# Altium PCB LEDs.PcbDoc
Units mm, origin at the board's own origin, x right, y up, seen from the top; angles counter-clockwise.
Board outline 40 x 41.27 mm, 2 copper layers (Top Layer, Bottom Layer); 53 components, 120 nets, 164 pads, 38 vias.
Unrouted connection lines stored in the file: 3.
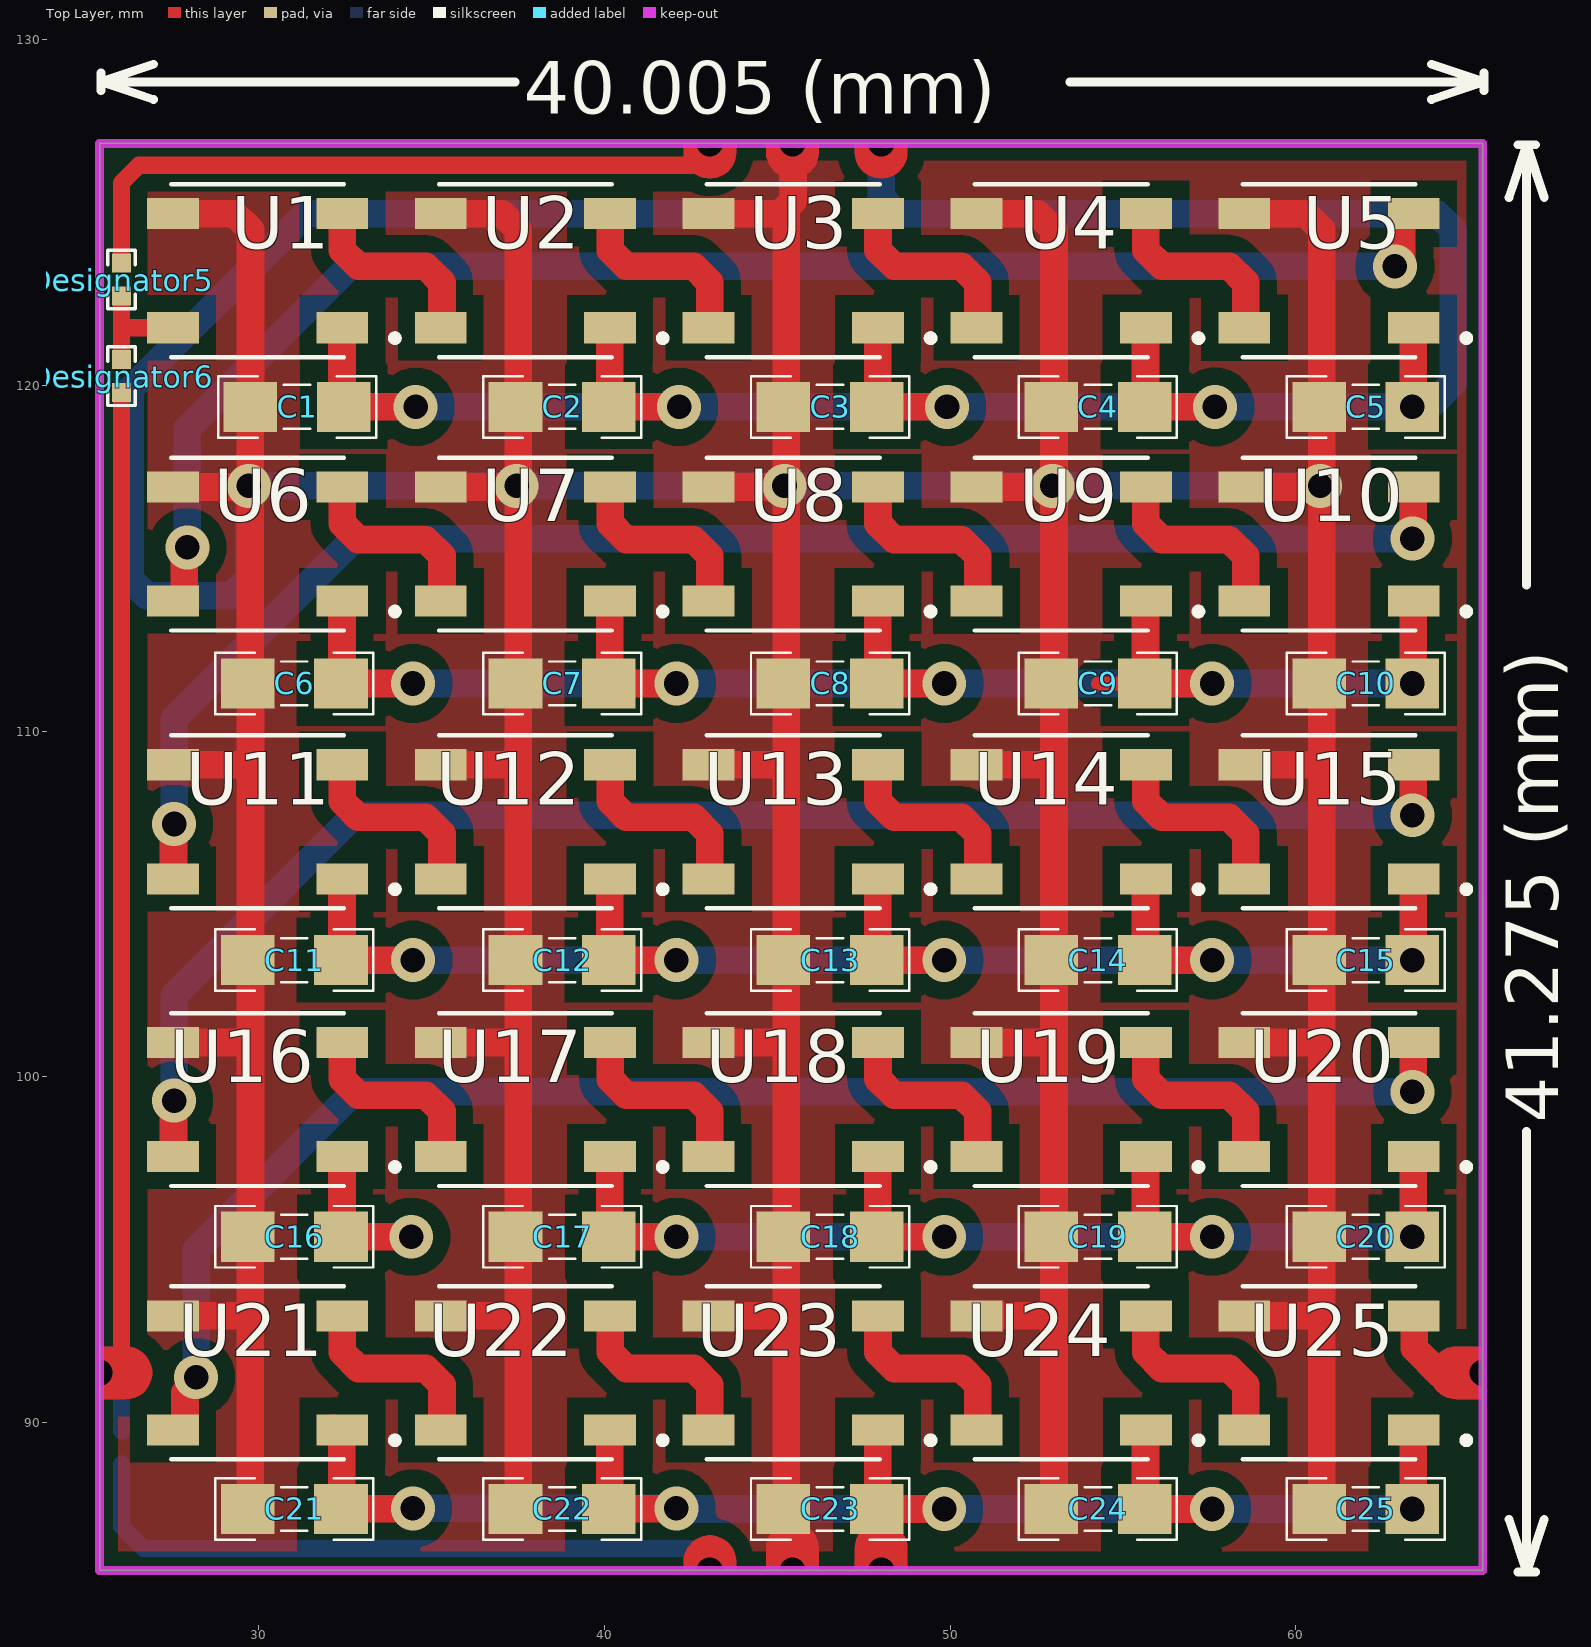
[diagram p0: Top Layer view]
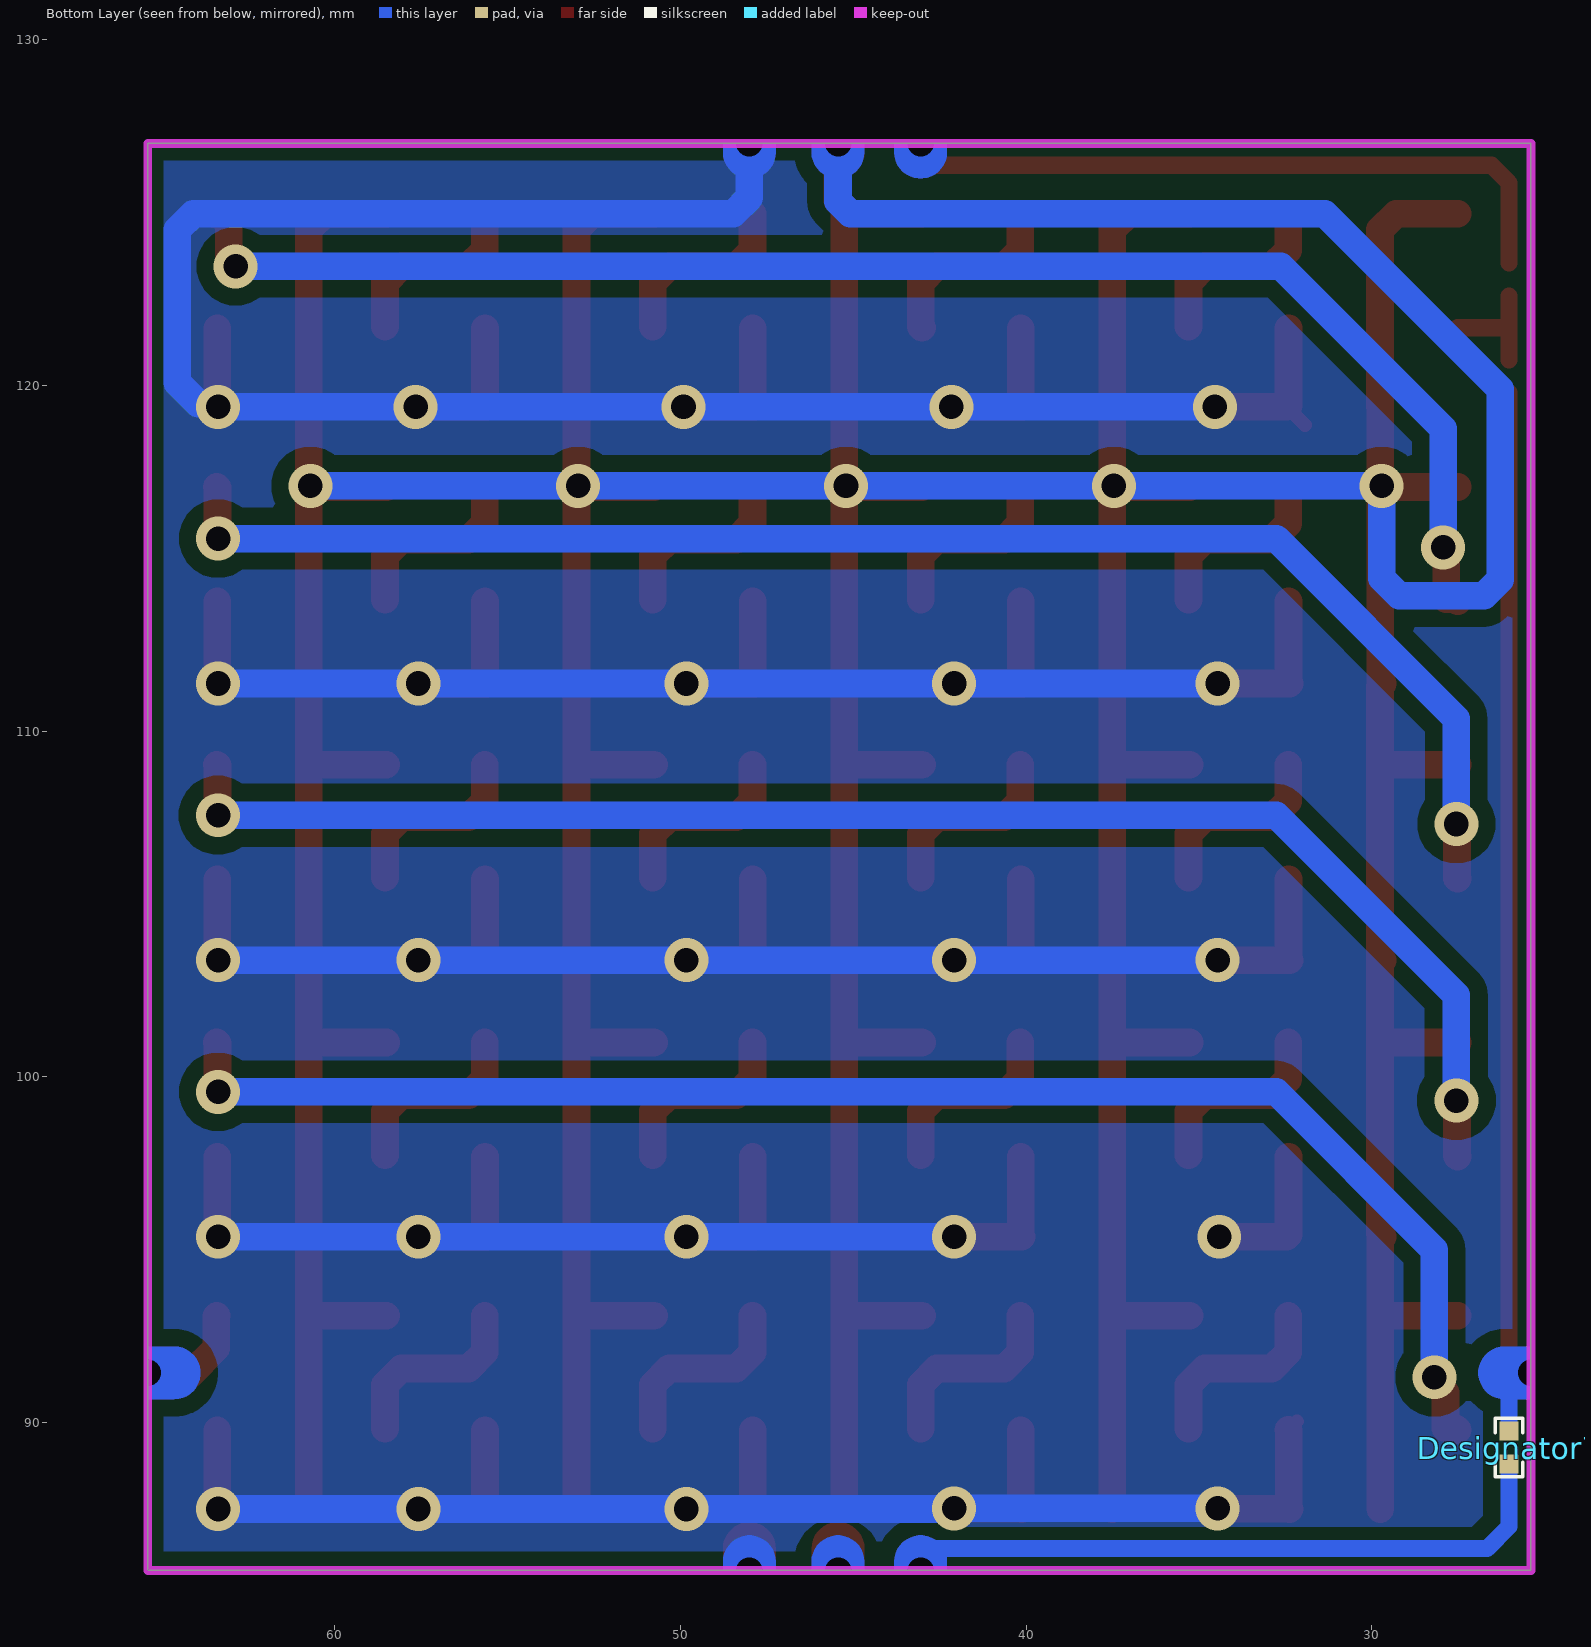
[diagram p1: Bottom Layer view, seen from below]
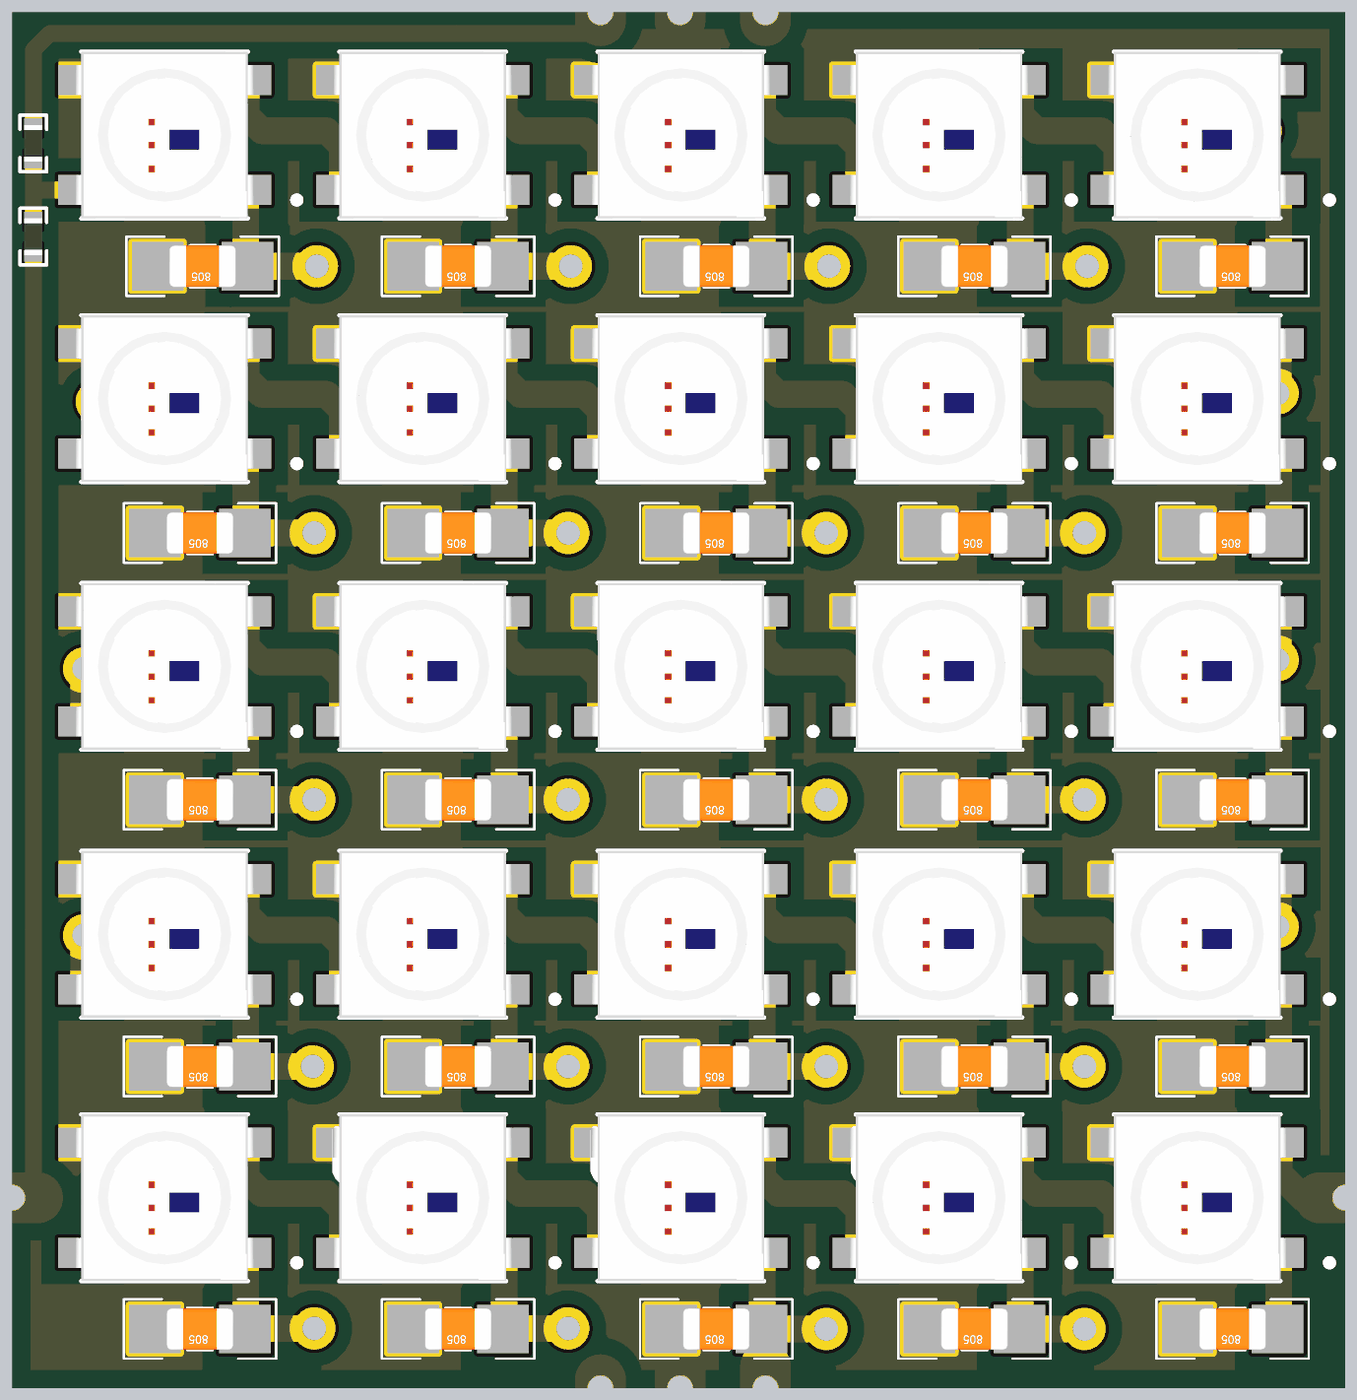
[diagram p2: 3D render of the assembled board from above, using the file's embedded part models]

## Layer stack, top to bottom
Top Solder: solder mask 0.0102, Solder Resist, Dk 3.5
Top Layer: signal copper 0.0356
Dielectric 1: dielectric 0.32, FR-4, Dk 4.8
Bottom Layer: signal copper 0.0356
Bottom Solder: solder mask 0.0102, Solder Resist, Dk 3.5

## Board outline
25.4,85.725 65.405,85.725 65.405,127 25.4,127

## Design rules (kind name [scope] priority, off if disabled: settings)
Clearance [All] p1: gap=0.254 ignorepadtopadclearanceinfootprint=FALSE
PolygonConnect [All] p1: connectstyle=Direct reliefconductorwidth=0.254 reliefentries=4 polygonreliefangle="90 Angle" airgapwidth=0.254
RoutingVias [All] p1: holewidth=0.711 width=1.27 viastyle="Through Hole" minholewidth=0.711 minwidth=1.27 maxholewidth=0.711 maxwidth=1.27
SolderMaskExpansion [All] p1: expansion=0.102 istentingtop=FALSE
Width [All] p1: maxlimit=2 minlimit=0.254 preferedwidth=0.8
30 further rules are at their usual default settings.

## Classes and differential pairs
component class LEDs: C1 C2 C3 C4 C5 C6 C7 C8 C9 C10 C11 C12 C13 C14 C15 C16 C17 C18 C19 C20 C21 C22 C23 C24 C25 F F2 U2 U3 U4 U6 U7 U8 U9 U10 U11 U12 U13 U14 U15 U16 U17 U18 U19 U20 U21 U22 U23 U24 U25

## Components (designator, comment, footprint, x,y, rotation, side; value= is the part's Value field where it differs from the comment)
C1 "0.1uF" CAPC3413X12N 31.115,119.38 r180 top
C2 "0.1uF" CAPC3413X12N 38.782,119.38 r180 top
C3 "0.1uF" CAPC3413X12N 46.529,119.38 r180 top
C4 "0.1uF" CAPC3413X12N 54.276,119.38 r180 top
C5 "0.1uF" CAPC3413X12N 62.023,119.38 r180 top
C6 "0.1uF" CAPC3413X12N 31.035,111.379 r180 top
C7 "0.1uF" CAPC3413X12N 38.782,111.379 r180 top
C8 "0.1uF" CAPC3413X12N 46.529,111.379 r180 top
C9 "0.1uF" CAPC3413X12N 54.276,111.379 r180 top
C10 "0.1uF" CAPC3413X12N 62.023,111.379 r180 top
C11 "0.1uF" CAPC3413X12N 31.035,103.378 r180 top
C12 "0.1uF" CAPC3413X12N 38.782,103.378 r180 top
C13 "0.1uF" CAPC3413X12N 46.529,103.378 r180 top
C14 "0.1uF" CAPC3413X12N 54.276,103.378 r180 top
C15 "0.1uF" CAPC3413X12N 62.023,103.378 r180 top
C16 "0.1uF" CAPC3413X12N 31.035,95.377 r180 top
C17 "0.1uF" CAPC3413X12N 38.782,95.377 r180 top
C18 "0.1uF" CAPC3413X12N 46.529,95.377 r180 top
C19 "0.1uF" CAPC3413X12N 54.276,95.377 r180 top
C20 "0.1uF" CAPC3413X12N 62.023,95.377 r180 top
C21 "0.1uF" CAPC3413X12N 31.035,87.503 r180 top
C22 "0.1uF" CAPC3413X12N 38.782,87.503 r180 top
C23 "0.1uF" CAPC3413X12N 46.529,87.503 r180 top
C24 "0.1uF" CAPC3413X12N 54.276,87.503 r180 top
C25 "0.1uF" CAPC3413X12N 62.023,87.503 r180 top
Designator5 "Comment" RES0402 26.035,123.063 r90 top
Designator6 "Comment" RES0402 26.035,120.269 r90 top
Designator7 "Comment" RES0402 26.035,89.281 r90 bottom
U1 "WS2812B-B" LED_WS2812B-B 29.972,123.317 r180 top
U2 "WS2812B-B" LED_WS2812B-B 37.719,123.317 r180 top
U3 "WS2812B-B" LED_WS2812B-B 45.466,123.317 r180 top
U4 "WS2812B-B" LED_WS2812B-B 53.213,123.317 r180 top
U5 "WS2812B-B" LED_WS2812B-B 60.96,123.317 r180 top
U6 "WS2812B-B" LED_WS2812B-B 29.972,115.411 r180 top
U7 "WS2812B-B" LED_WS2812B-B 37.719,115.411 r180 top
U8 "WS2812B-B" LED_WS2812B-B 45.466,115.411 r180 top
U9 "WS2812B-B" LED_WS2812B-B 53.213,115.411 r180 top
U10 "WS2812B-B" LED_WS2812B-B 60.96,115.411 r180 top
U11 "WS2812B-B" LED_WS2812B-B 29.972,107.379 r180 top
U12 "WS2812B-B" LED_WS2812B-B 37.719,107.379 r180 top
U13 "WS2812B-B" LED_WS2812B-B 45.466,107.379 r180 top
U14 "WS2812B-B" LED_WS2812B-B 53.213,107.379 r180 top
U15 "WS2812B-B" LED_WS2812B-B 60.96,107.379 r180 top
U16 "WS2812B-B" LED_WS2812B-B 29.972,99.346 r180 top
U17 "WS2812B-B" LED_WS2812B-B 37.719,99.346 r180 top
U18 "WS2812B-B" LED_WS2812B-B 45.466,99.346 r180 top
U19 "WS2812B-B" LED_WS2812B-B 53.213,99.346 r180 top
U20 "WS2812B-B" LED_WS2812B-B 60.96,99.346 r180 top
U21 "WS2812B-B" LED_WS2812B-B 29.972,91.44 r180 top
U22 "WS2812B-B" LED_WS2812B-B 37.719,91.44 r180 top
U23 "WS2812B-B" LED_WS2812B-B 45.466,91.44 r180 top
U24 "WS2812B-B" LED_WS2812B-B 53.213,91.44 r180 top
U25 "WS2812B-B" LED_WS2812B-B 60.96,91.44 r180 top

## Footprints (in the part's own frame and the unit in brackets; to place one, negate y for a bottom-side part, rotate by r counter-clockwise, add the part's x,y. Pads: shape width x height; smd on the part's side, far side on the other; paste and mask are expansions set on the pad)
CAPC3413X12N [mm] "Chip Capacitor, 2-Leads, Body 3/40x1/30mm, IPC Medium Density-Design:Abbas Basereh"
  rect 1.55x1.45 smd: 1(-1.35,0) 2(1.35,0)
  silkscreen extent -2.29,-0.89 2.29,0.89, body extent -1,-0.62 1,0.63, height 0.78
LED_WS2812B-B [mm]
  rect 1.5x0.9 smd: 1(-2.45,1.65) 2(-2.45,-1.65) 3(2.45,-1.65) 4(2.45,1.65)
  silkscreen extent -4.07,-2.5 2.5,2.5, body extent -2.7,-2.5 2.7,2.5, height 1.6
RES0402 [mm] "Chip Resistor, 2-Leads, Body 1/00x0/50mm, IPC Medium Density DESIGNER:ABBAS BASEREH"
  rect 0.55x0.55 smd mask+0.06: 1(-0.475,0) 2(0.475,0)
  silkscreen extent -0.85,-0.4 0.85,0.4, body extent -0.55,-0.28 0.55,0.28, height 0.32

## Part data
C1 C2 C3 C4 C5 C6 C7 C8 C9 C10 C11 C12 C13 C14 C15 C16 C17 C18 C19 C20 C21 C22 C23 C24 C25: library part "CAP SMD 0805", "CAP 0805", Data=16-12-2016, Desc.="CAP SMD 0805", Designer="Abbas Basereh"
U1 U2 U3 U4 U5 U6 U7 U8 U9 U10 U11 U12 U13 U14 U15 U16 U17 U18 U19 U20 U21 U22 U23 U24 U25: "Intelligent control LED integrated light source", Package=Package, Availability=Unavailable, Check_prices=https://www.snapeda.com/parts/WS2812B-B/Worldsemi/view-part/5799638/?ref=eda, MF=Worldsemi, MP=WS2812B-B, Price=None, SnapEDA_Link=https://www.snapeda.com/parts/WS2812B-B/Worldsemi/view-part/5799638/?ref=snap

## Free pads (board coordinates)
  round 0 hole 0.762: 4(25.4,91.44) 4(43.053,85.725) 4(43.053,127) 4(45.441,85.725) 4(45.441,127) 4(48.006,85.725) 4(48.006,127) 4(65.405,91.44)

## Via types
v1: diameter 1.27, hole 0.711, Top Layer to Bottom Layer, 38 vias

## Nets (pads, with @x,y where several pads share a name; then routed paths per layer and width w, separated by ;. In a path a pad name is that pad's centre, name@x,y a point inside that pad or via, vN(x,y) a via of type N, cw(c..) or ccw(c..) an arc to the next point about the centre after c; other vN are vias at no path point)
+3.3: 
+5: C1.1 C2.1 C3.1 C4.1 C5.1 C6.1 C7.1 C8.1 C9.1 C10.1 C11.1 C12.1 C13.1 C14.1 C15.1 C16.1 C17.1 C18.1 C19.1 C20.1 C21.1 C22.1 C23.1 C24.1 C25.1 pad.4@48.006,85.725 pad.4@48.006,127 U1.1 U2.1 U3.1 U4.1 U5.1 U6.1 U7.1 U8.1 U9.1 U10.1 U11.1 U12.1 U13.1 U14.1 U15.1 U16.1 U17.1 U18.1 U19.1 U20.1 U21.1 U22.1 U23.1 U24.1 U25.1 | length 258.9
  Top Layer w0.4: C1.1@31.94,118.855 C1.1 ; U21.1@32.172,90.04 U21.1 ; U3.1@47.907,121.658 U3.1 ; 54.282,111.379 C9.1@55.546,111.379
  Top Layer w0.8: C11.1 v1(34.464,103.378) ; C6.1 v1(34.464,111.379) ; U16.1@32.413,97.687 32.413,95.436 32.472,95.377 v1(34.417,95.377) ; C11.1@32.413,103.469 U11.1@32.413,105.719 ; C6.1@32.413,111.502 U6.1@32.413,113.752 ; C1.1@32.413,119.408 U1.1@32.413,121.658 ; U21.1 32.404,89.772 32.404,87.522 C21.1 32.395,87.513 34.455,87.513 v1(34.464,87.522) ; C1.1 v1(34.544,119.38) ; C22.1 40.142,87.513 42.075,87.513 v1(42.084,87.522) ; C17.1 v1(42.084,95.377) ; C12.1 v1(42.084,103.378) ; C7.1 v1(42.084,111.379) ; C2.1 v1(42.164,119.38) ; C22.1@40.16,87.531 U22.1@40.16,89.781 ; C17.1@40.16,95.436 U17.1@40.16,97.687 ; C12.1@40.16,103.469 U12.1@40.16,105.719 ; C7.1@40.16,111.502 U7.1@40.16,113.752 ; C2.1@40.16,119.408 U2.1@40.16,121.658 ; C23.1 v1(49.831,87.503) ; C18.1 v1(49.831,95.377) ; C13.1 v1(49.831,103.378) ; C8.1 v1(49.831,111.379) ; C3.1 v1(49.911,119.38) ; C23.1@47.907,87.531 U23.1@47.907,89.781 ; C18.1@47.907,95.436 U18.1@47.907,97.687 ; C13.1@47.907,103.469 U13.1@47.907,105.719 ; C8.1@47.907,111.502 U8.1@47.907,113.752 ; C3.1@47.907,119.408 U3.1@47.907,121.658 ; C24.1 v1(57.578,87.503) ; C19.1 v1(57.578,95.377) ; C14.1 v1(57.578,103.378) ; C9.1 v1(57.578,111.379) ; C4.1 v1(57.658,119.38) ; C24.1@55.654,87.531 U24.1@55.654,89.781 ; C19.1@55.654,95.436 U19.1@55.654,97.687 ; C14.1@55.654,103.469 U14.1@55.654,105.719 ; C9.1@55.654,111.502 U9.1@55.654,113.752 ; C4.1@55.654,119.408 U4.1@55.654,121.658 ; C25.1@63.401,87.531 U25.1@63.401,89.781 ; C20.1@63.401,95.436 U20.1@63.401,97.687 ; C15.1@63.401,103.469 U15.1@63.401,105.719 ; C10.1@63.401,111.502 U10.1@63.401,113.752 ; C5.1@63.401,119.408 U5.1@63.401,121.658
  Bottom Layer w0.8: v1(34.464,87.522) v1(42.084,87.522) ; v1(34.464,103.378) v1(42.084,103.378) v1(49.831,103.378) v1(57.578,103.378) v1(63.373,103.378) ; v1(34.464,111.379) v1(42.084,111.379) v1(49.831,111.379) v1(57.578,111.379) v1(63.373,111.379) ; v1(34.544,119.38) v1(42.164,119.38) v1(49.911,119.38) ; v1@42.084,87.503 v1(49.831,87.503) v1@57.488,87.503 ; v1(42.084,95.377) v1(49.831,95.377) 57.383,95.377 v1@57.488,95.272 ; 48.006,126.365 48.006,125.437 48.475,124.968 64.085,124.968 64.554,124.499 64.554,120.084 63.94,119.47 63.59,119.47 63.5,119.38 v1(57.658,119.38) v1(49.911,119.38) ; v1@49.871,119.34 v1(49.911,119.38) ; v1(57.578,87.503) v1(63.373,87.503) ; v1(57.578,95.377) v1@63.246,95.377
  other v1: 63.373,95.377 63.373,119.38
EN: 
GND: C1.2 C2.2 C3.2 C4.2 C5.2 C6.2 C7.2 C8.2 C9.2 C10.2 C11.2 C12.2 C13.2 C14.2 C15.2 C16.2 C17.2 C18.2 C19.2 C20.2 C21.2 C22.2 C23.2 C24.2 C25.2 pad.4@45.441,85.725 pad.4@45.441,127 U1.3 U2.3 U3.3 U4.3 U5.3 U6.3 U7.3 U8.3 U9.3 U10.3 U11.3 U12.3 U13.3 U14.3 U15.3 U16.3 U17.3 U18.3 U19.3 U20.3 U21.3 U22.3 U23.3 U24.3 U25.3 | length 299.8
  Top Layer w0.4: U3.3 U3.3@43.053,125.004
  Top Layer w0.8: U21.3 29.295,93.09 ; U16.3 29.295,100.996 ; U11.3 29.295,109.028 ; U6.3 v1@29.295,117.061 ; U1.3 27.523,124.968 29.296,124.968 29.765,124.499 C1.2 ; C16.2 29.765,95.457 29.765,103.298 C11.2 29.765,103.458 29.765,111.299 C6.2 ; C21.2@29.764,87.502 C16.2@29.764,95.377 ; C6.2@29.764,111.379 C1.2@29.764,119.38 ; U22.3 37.042,93.09 ; U17.3 37.042,100.996 ; U12.3 37.042,109.028 ; U7.3 v1@37.042,117.061 ; U2.3 37.042,124.967 37.511,124.498 37.511,111.379 37.511,103.378 C22.2@37.511,87.502 ; U23.3 44.789,93.09 ; U18.3 44.789,100.996 ; U13.3 44.789,109.028 ; U8.3 v1@44.789,117.061 ; U3.3 45.085,124.967 ; C23.2@45.258,87.502 45.258,95.377 45.258,103.378 45.258,111.379 45.258,117.094 45.258,119.38 45.258,125.141 45.466,125.349 45.466,126.365 ; U24.3 52.536,93.09 ; U19.3 52.536,100.996 ; U14.3 52.536,109.028 ; U9.3 v1@52.536,117.061 ; U4.3 52.536,124.967 53.005,124.498 53.005,111.379 53.005,103.378 53.005,95.377 C24.2@53.005,87.502 ; U25.3 60.283,93.09 ; U20.3 60.283,100.996 ; U15.3 60.283,109.028 ; U10.3 v1@60.283,117.061 ; U5.3 60.283,124.967 60.752,124.498 60.752,111.379 60.752,103.378 60.752,95.377 C25.2@60.752,87.502
  Bottom Layer w0.8: 45.444,126.365 45.444,125.328 45.084,124.968 31.369,124.968 26.289,119.888 26.289,114.388 26.758,113.919 29.21,113.919 29.718,114.427 v1(29.718,117.094) v1(37.465,117.094) v1(45.212,117.094) v1(52.959,117.094) v1(60.706,117.094)
GPIO0: 
GPIO2: 
GPIO4: 
GPIO5: Designator5.1 Designator5.2 Designator6.1 Designator6.2 Designator7.1 Designator7.2 pad.4@25.4,91.44 pad.4@43.053,85.725 pad.4@43.053,127 U1.4 | length 72.2
  Top Layer w0.4: 26.035,90.985 26.035,91.567
  Top Layer w0.5: 26.035,91.567 Designator6.1 ; Designator6.2 26.035,121.667 ; Designator5.1 26.035,121.667 ; Designator5.2 26.035,125.857 26.543,126.365 42.926,126.365 ; U1.4 26.035,121.667
  Bottom Layer w0.5: Designator7.1 26.035,86.995 26.67,86.36 42.803,86.36 ; Designator7.2 26.035,91.567
GPIO9: 
GPIO10: 
GPIO12: 
GPIO13: 
GPIO14: 
GPIO15: 
GPIO16: 
NetD1_2: 
NetR5_1: 
NetR7_2: 
NetU1_2: U1.2 U2.4 | length 5.6
  Top Layer w0.8: U1.2 32.422,123.913 32.891,123.444 34.837,123.444 35.306,122.975 U2.4@35.306,121.704
NetU2_2: U2.2 U3.4 | length 5.7
  Top Layer w0.8: U2.2 40.169,123.913 40.638,123.444 42.584,123.444 43.053,122.975 43.053,121.704 U3.4
NetU3_2: U3.2 U4.4 | length 5.6
  Top Layer w0.8: U3.2 47.916,123.913 48.385,123.444 50.331,123.444 50.8,122.975 U4.4@50.8,121.704
NetU4_2: U4.2 U5.4 | length 5.6
  Top Layer w0.8: U4.2 55.663,123.913 56.132,123.444 58.078,123.444 58.547,122.975 U5.4@58.547,121.704
NetU5_2: U5.2 U6.4 | length 44.1
  Top Layer w0.8: U6.4 27.572,113.811 27.85,113.811 27.85,115.226 v1(27.94,115.316) ; v1(62.865,123.444) 62.865,123.571 63.06,123.766 63.06,124.917 63.36,124.917 U5.2
  Bottom Layer w0.8: v1(27.94,115.316) 27.94,118.745 32.639,123.444 v1(62.865,123.444)
NetU6_2: U6.2 U7.4 | length 5.6
  Top Layer w0.8: U6.2 32.422,116.007 32.891,115.538 34.837,115.538 35.306,115.07 U7.4@35.306,113.798
NetU7_2: U7.2 U8.4 | length 5.6
  Top Layer w0.8: U7.2 40.169,116.007 40.638,115.538 42.584,115.538 43.053,115.07 U8.4@43.053,113.798
NetU8_2: U8.2 U9.4 | length 5.6
  Top Layer w0.8: U8.2 47.916,116.007 48.385,115.538 50.331,115.538 50.8,115.07 U9.4@50.8,113.798
NetU9_2: U9.2 U10.4 | length 5.6
  Top Layer w0.8: U9.2 55.663,116.007 56.132,115.538 58.078,115.538 58.547,115.07 U10.4@58.547,113.798
NetU10_2: U10.2 U11.4 | length 44.1
  Top Layer w0.8: U11.4 27.541,105.747 27.541,107.297 v1(27.559,107.315) ; v1(63.373,115.57) 63.391,115.588 63.391,117.043 U10.2
  Bottom Layer w0.8: v1(27.559,107.315) 27.559,110.363 32.766,115.57 v1(63.373,115.57)
NetU11_2: U11.2 U12.4 | length 5.6
  Top Layer w0.8: U11.2 32.422,107.974 32.891,107.505 34.837,107.505 35.306,107.037 U12.4@35.306,105.766
NetU12_2: U12.2 U13.4 | length 5.6
  Top Layer w0.8: U12.2 40.169,107.974 40.638,107.505 42.584,107.505 43.053,107.037 U13.4@43.053,105.766
NetU13_2: U13.2 U14.4 | length 5.6
  Top Layer w0.8: U13.2 47.916,107.974 48.385,107.505 50.331,107.505 50.8,107.037 U14.4@50.8,105.766
NetU14_2: U14.2 U15.4 | length 5.6
  Top Layer w0.8: U14.2 55.663,107.974 56.132,107.505 58.078,107.505 58.547,107.037 U15.4@58.547,105.766
NetU15_2: U15.2 U16.4 | length 44.1
  Top Layer w0.8: U16.4 27.541,97.714 27.541,99.296 v1(27.559,99.314) ; v1(63.373,107.569) 63.391,107.587 63.391,109.01 U15.2
  Bottom Layer w0.8: v1(27.559,99.314) 27.559,102.362 32.766,107.569 v1(63.373,107.569)
NetU16_2: U16.2 U17.4 | length 5.6
  Top Layer w0.8: U16.2 32.422,99.941 32.891,99.473 34.837,99.473 35.306,99.004 U17.4@35.306,97.733
NetU17_2: U17.2 U18.4 | length 5.6
  Top Layer w0.8: U17.2 40.169,99.941 40.638,99.473 42.584,99.473 43.053,99.004 U18.4@43.053,97.733
NetU18_2: U18.2 U19.4 | length 5.6
  Top Layer w0.8: U18.2 47.916,99.941 48.385,99.473 50.331,99.473 50.8,99.004 U19.4@50.8,97.733
NetU19_2: U19.2 U20.4 | length 5.6
  Top Layer w0.8: U19.2 55.663,99.941 56.132,99.473 58.078,99.473 58.547,99.004 U20.4@58.547,97.733
NetU20_2: U20.2 U21.4 | length 44.2
  Top Layer w0.8: U21.4 27.572,89.84 27.872,89.84 27.872,90.864 28.194,91.186 v1(28.194,91.313) ; v1(63.373,99.568) 63.391,99.586 63.391,100.977 U20.2
  Bottom Layer w0.8: v1(28.194,91.313) 28.194,94.996 32.766,99.568 v1(63.373,99.568)
NetU21_2: U21.2 U22.4 | length 5.6
  Top Layer w0.8: U21.2 32.422,92.036 32.891,91.567 34.837,91.567 35.306,91.098 U22.4@35.306,89.827
NetU22_2: U22.2 U23.4 | length 5.6
  Top Layer w0.8: U22.2 40.169,92.036 40.638,91.567 42.584,91.567 43.053,91.098 U23.4@43.053,89.827
NetU23_2: U23.2 U24.4 | length 5.6
  Top Layer w0.8: U23.2 47.916,92.036 48.385,91.567 50.331,91.567 50.8,91.098 U24.4@50.8,89.827
NetU24_2: U24.2 U25.4 | length 5.6
  Top Layer w0.8: U24.2 55.663,92.036 56.132,91.567 58.078,91.567 58.547,91.098 U25.4@58.547,89.827
NetU26_2: 
NetU27_2: 
NetU28_2: 
NetU29_2: 
NetU30_2: 
NetU31_2: 
NetU32_2: 
NetU33_2: 
NetU34_2: 
NetU35_2: 
NetU36_2: 
NetU37_2: 
NetU38_2: 
NetU39_2: 
NetU40_2: 
NetU41_2: 
NetU42_2: 
NetU43_2: 
NetU44_2: 
NetU45_2: 
NetU46_2: 
NetU47_2: 
NetU48_2: 
NetU49_2: 
NetU51_2: 
NetU52_2: 
NetU53_2: 
NetU54_2: 
NetU55_2: 
NetU56_2: 
NetU57_2: 
NetU58_2: 
NetU59_2: 
NetU60_2: 
NetU61_2: 
NetU62_2: 
NetU63_2: 
NetU64_2: 
NetU65_2: 
NetU66_2: 
NetU67_2: 
NetU68_2: 
NetU69_2: 
NetU70_2: 
NetU71_2: 
NetU72_2: 
NetU73_2: 
NetU74_2: 
NetU76_2: 
NetU77_2: 
NetU78_2: 
NetU79_2: 
NetU80_2: 
NetU81_2: 
NetU82_2: 
NetU83_2: 
NetU84_2: 
NetU85_2: 
NetU86_2: 
NetU87_2: 
NetU88_2: 
NetU89_2: 
NetU90_2: 
NetU91_2: 
NetU92_2: 
NetU93_2: 
NetU94_2: 
NetU95_2: 
NetU96_2: 
NetU97_2: 
NetU98_2: 
NetU99_2: 
nRST: 
OUTPUT1: pad.4@65.405,91.44 U25.2 | length 2
  Top Layer w0.8: U25.2 63.424,93.076 63.424,92.151 64.168,91.407
OUTPUT2: 
OUTPUT3: 
RXD: 
TXD: 

## Polygon pours and split planes (outlines as drawn)
+5 on Bottom Layer "POL12" (solid, remove dead copper, pour order 0): 25.949,126.492 64.938,126.492 64.938,86.275 25.949,86.275
GND on Top Layer "POL12" (solid, remove dead copper, pour order 1): 25.947,126.494 64.936,126.494 64.936,86.276 25.947,86.276

## Keep-outs
Keep-Out Layer:
  the board outline again, w0.254

## Other copper
Top Layer:
  region net GPIO5: 42.291,126.746 ccw(c43.053,126.746) 43.815,126.746 43.815,127 42.291,127
  region net GND: 44.679,86.36 cw(c45.441,86.36) 46.203,86.36 46.203,85.725 44.679,85.725
  region net +5: 47.244,86.36 cw(c48.006,86.36) 48.768,86.36 48.768,85.725 47.244,85.725
  region net GPIO5: 42.291,85.979 cw(c43.053,85.979) 43.815,85.979 43.815,85.725 42.291,85.725
  region net OUTPUT1: 64.643,90.678 cw(c64.643,91.44) 64.643,92.202 65.405,92.202 65.405,90.678
  region net +5: 47.244,126.746 ccw(c48.006,126.746) 48.768,126.746 48.768,127 47.244,127
  region net GND: 44.679,126.746 ccw(c45.441,126.746) 46.203,126.746 46.203,127 44.679,127
  region net GPIO5: 26.162,90.678 ccw(c26.162,91.44) 26.162,92.202 25.4,92.202 25.4,90.678
Bottom Layer:
  region net GPIO5: 42.291,126.746 ccw(c43.053,126.746) 43.815,126.746 43.815,127 42.291,127
  region net +5: 47.244,85.979 cw(c48.006,85.979) 48.768,85.979 48.768,85.725 47.244,85.725
  region net GND: 44.682,85.981 cw(c45.444,85.981) 46.206,85.981 46.206,85.727 44.682,85.727
  region net GPIO5: 42.291,85.979 cw(c43.053,85.979) 43.815,85.979 43.815,85.725 42.291,85.725
  region net GPIO5: 26.162,90.678 ccw(c26.162,91.44) 26.162,92.202 25.4,92.202 25.4,90.678
  region net OUTPUT1: 64.643,90.678 cw(c64.643,91.44) 64.643,92.202 65.405,92.202 65.405,90.678
  region net GND: 44.682,126.744 ccw(c45.444,126.744) 46.206,126.744 46.206,126.998 44.682,126.998
  region net +5: 47.244,126.746 ccw(c48.006,126.746) 48.768,126.746 48.768,127 47.244,127

## Silkscreen, mask and mechanical layers (free items; w line width, h text height)
Top Overlay:
  lines w0.254: 25.441,128.524 25.441,129.032 ; 26.965,128.27 25.441,128.778 ; 26.965,129.286 25.441,128.778 ; 37.419,128.778 25.441,128.778 ; 53.467,128.778 65.446,128.778 ; 63.922,128.27 65.446,128.778 ; 63.922,129.286 65.446,128.778 ; 65.446,128.524 65.446,129.032 ; 66.167,87.208 66.675,85.684 ; 66.167,125.435 66.675,126.959 ; 66.421,85.684 66.929,85.684 ; 66.421,126.959 66.929,126.959 ; 66.675,98.425 66.675,85.684 ; 66.675,114.219 66.675,126.959 ; 67.183,87.208 66.675,85.684 ; 67.183,125.435 66.675,126.959
  text "40.005 (mm)" at 37.673,127.864 h1.52
  text "41.275 (mm)" at 67.589,98.679 h1.52 r90